# Altium PCB Baud-TxRx.PcbDoc
Units mm, origin at the board's own origin, x right, y up, seen from the top; angles counter-clockwise.
Board outline 152.4 x 101.6 mm, 2 copper layers (Top Layer, Bottom Layer); 5 components, 0 nets, 30 pads, 0 vias.
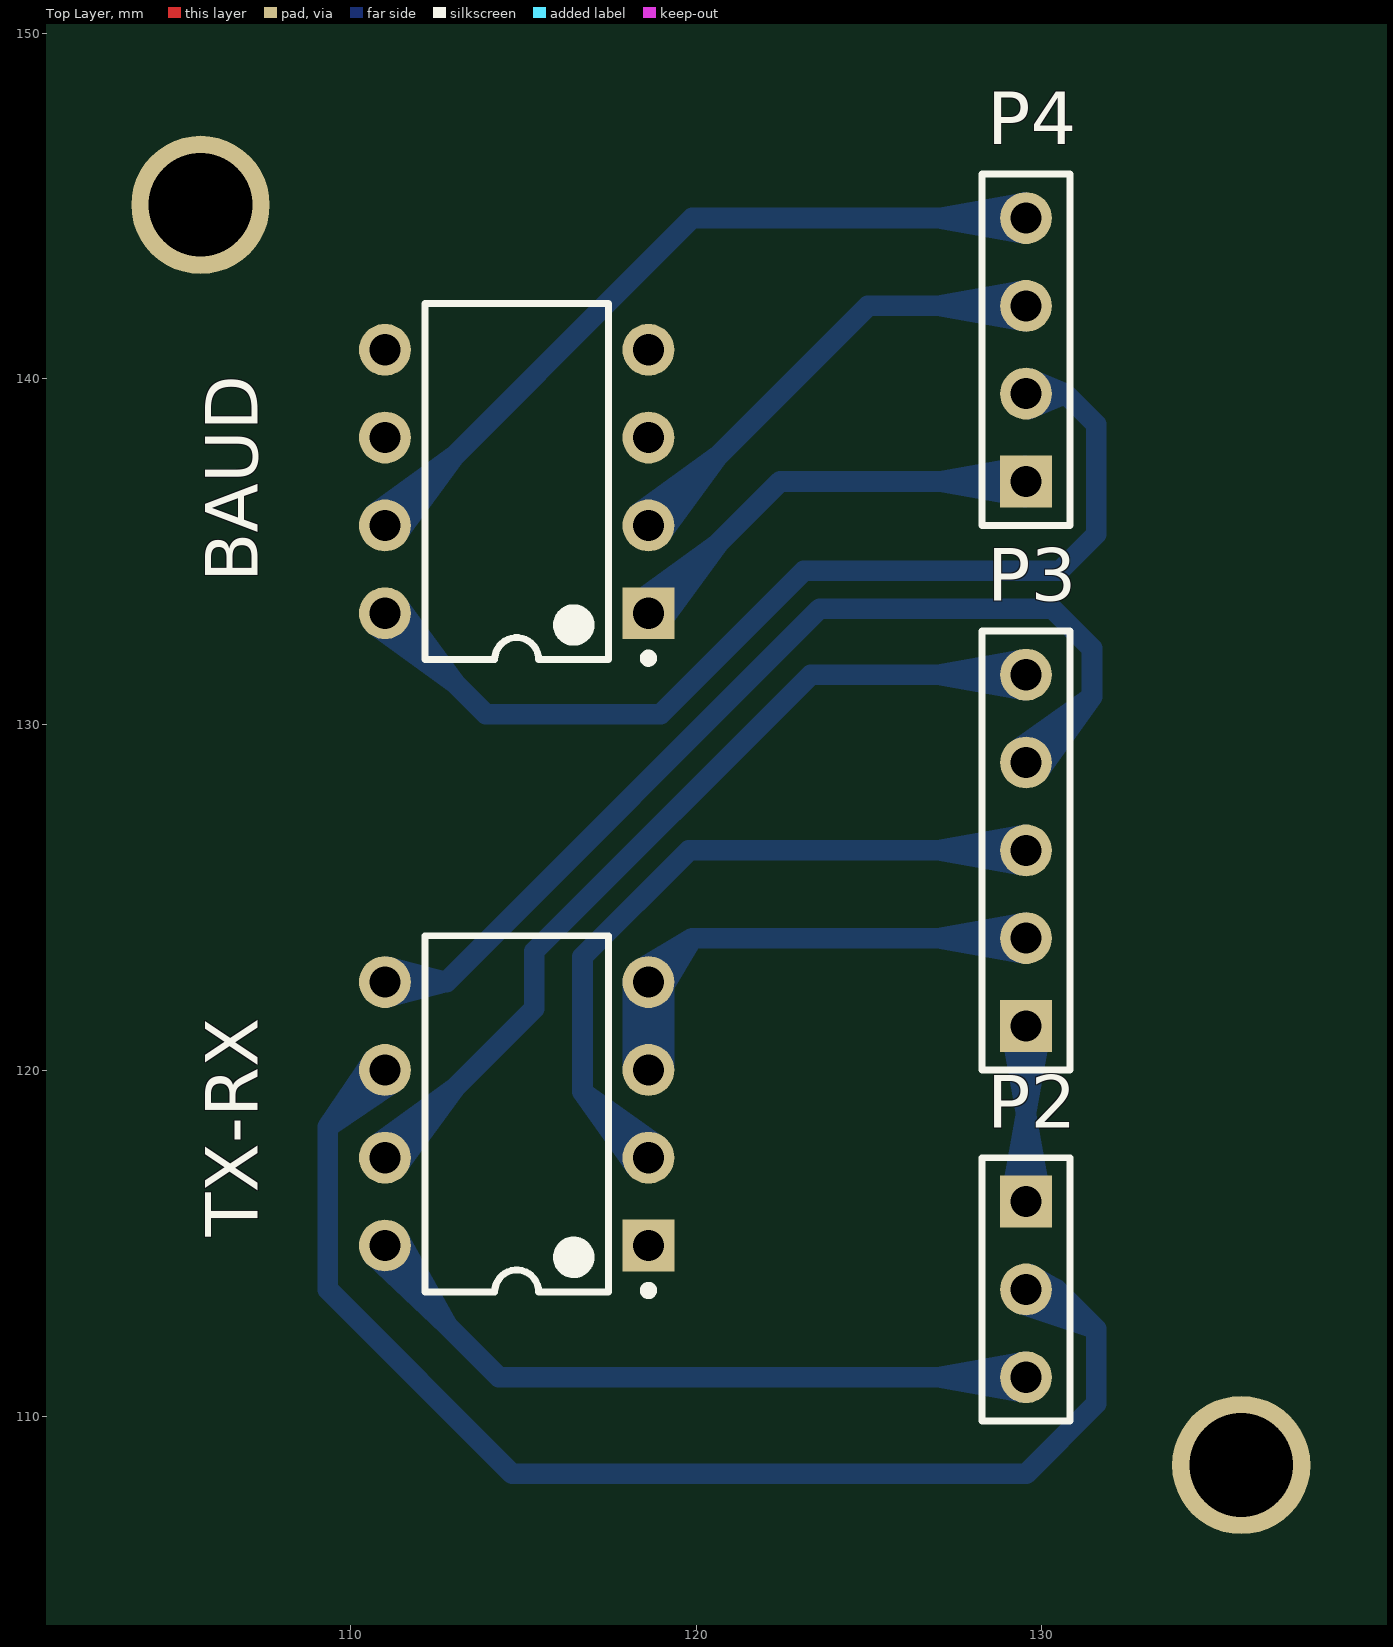
[diagram p0: Top Layer view]
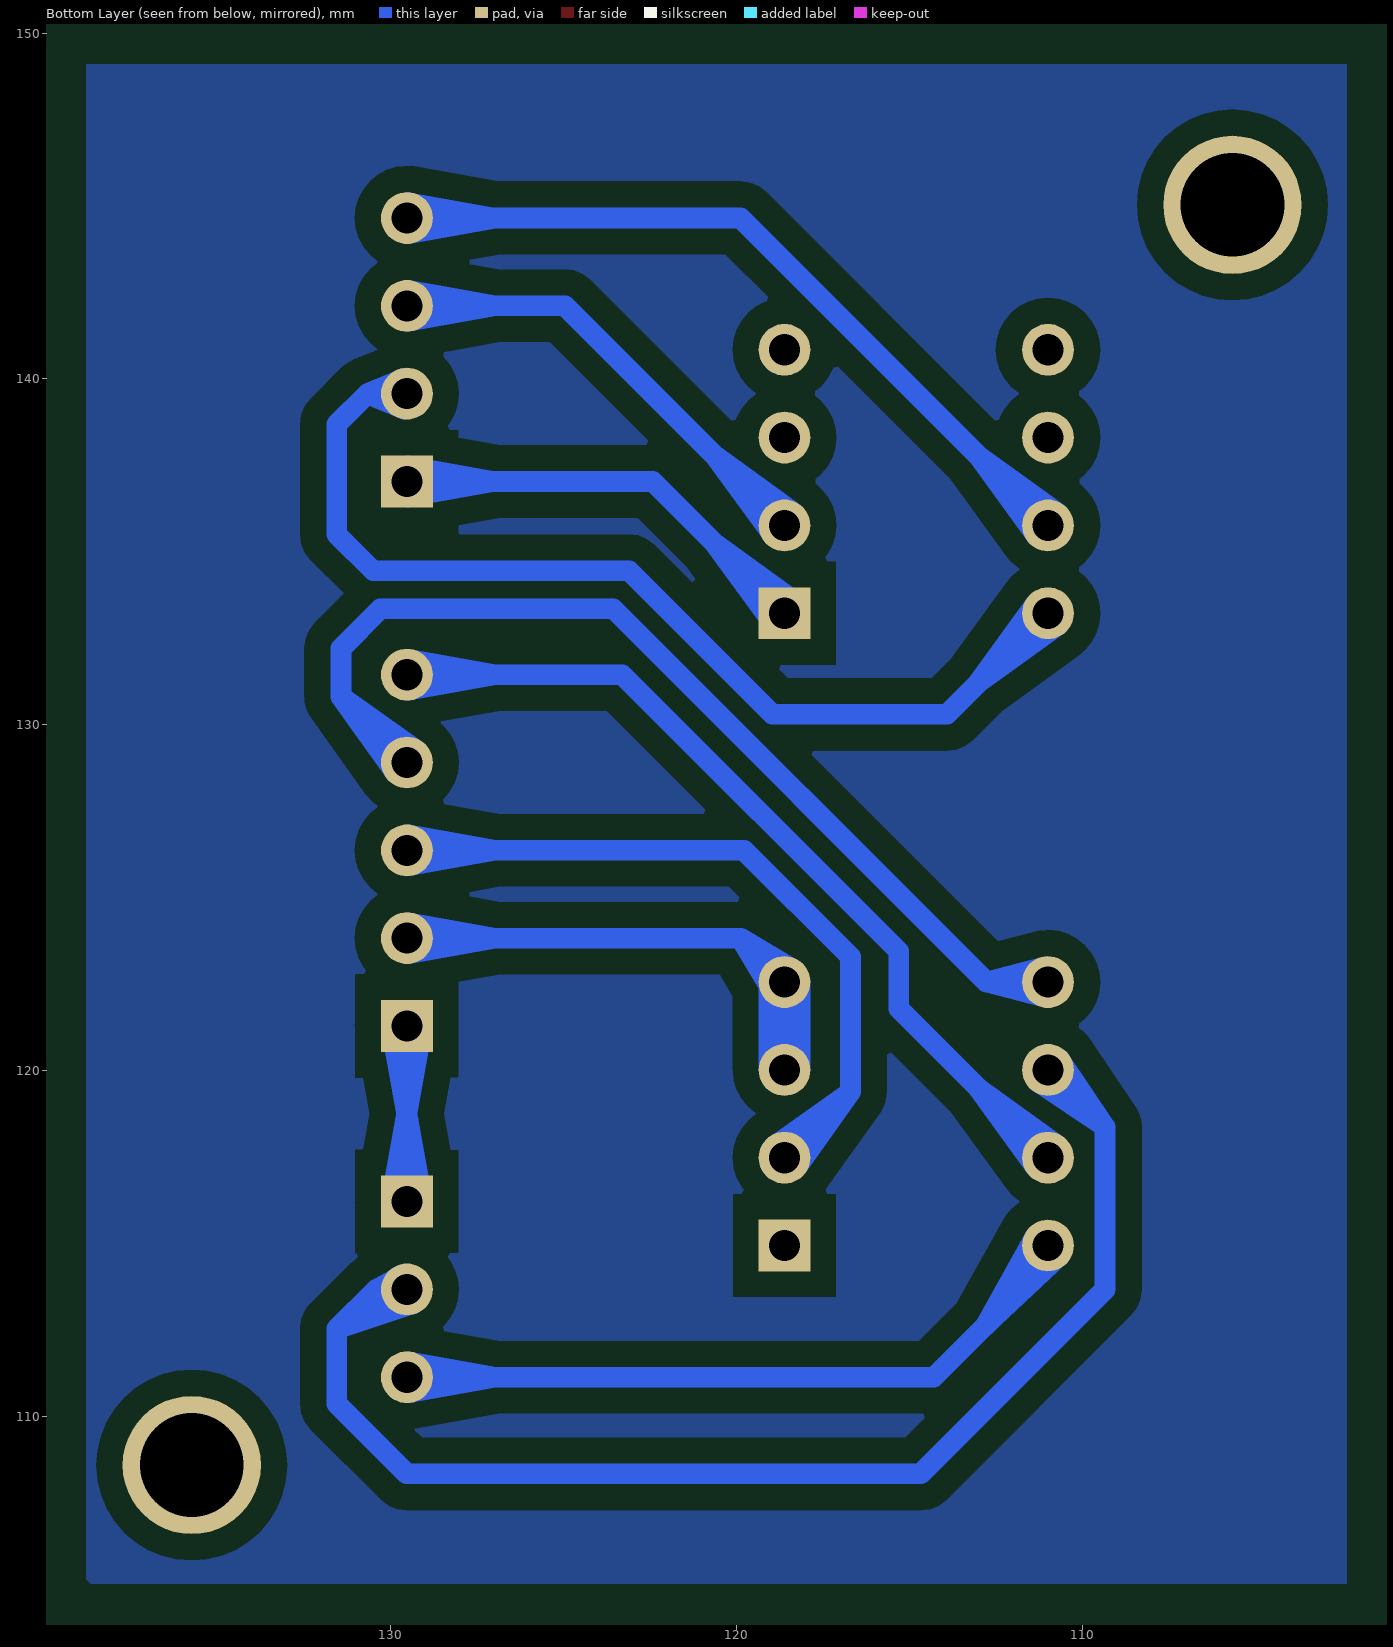
[diagram p1: Bottom Layer view, seen from below]

## Layer stack, top to bottom
Top Layer: signal copper 0.0356
Dielectric: dielectric 0.32, FR-4, Dk 4.8
Bottom Layer: signal copper 0.0356

## Board outline
16.383,82.55 168.783,82.55 168.783,184.15 16.383,184.15

## Design rules (kind name [scope] priority, off if disabled: settings)
Clearance [All] p1: gap=0.75
PolygonConnect [All] p1: connectstyle=Relief reliefconductorwidth=0.254 reliefentries=4 polygonreliefangle="90 Angle"
RoutingVias [All] p1: holewidth=0.711 width=1.27 viastyle="Through Hole" minholewidth=0.711 minwidth=1.27 maxholewidth=0.711 maxwidth=1.27
SilkscreenOverComponentPads [All] p1: minsilkscreentomaskgap=0.254
SolderMaskExpansion [All] p1: expansion=0.102
Width [All] p1: maxlimit=0.254 minlimit=0.254 preferedwidth=0.254
27 further rules are at their usual default settings.

## Components (designator, comment, footprint, x,y, rotation, side; value= is the part's Value field where it differs from the comment)
BAUD "SW-DIP4" DIP-8 114.808,137.033 r180 top (schematic designator S3)
P2 "Header 3" HDR1X3 129.54,116.205 r270 top
P3 "Header 5" HDR1X5 129.54,121.285 r90 top
P4 "Header 4" HDR1X4 129.54,137.033 r90 top
TX-RX "SW-DIP4" DIP-8 114.808,118.745 r180 top (schematic designator S2)

## Footprints (in the part's own frame and the unit in brackets; to place one, negate y for a bottom-side part, rotate by r counter-clockwise, add the part's x,y. Pads: shape width x height; smd on the part's side, far side on the other; paste and mask are expansions set on the pad)
DIP-8 [mm] "DIP; 8 Leads; Row Spacing 7.62 mm; Pitch 2.54 mm"
  rect 1.5x1.5 hole 0.9: 1(-3.81,3.81)
  round 1.5 hole 0.9: 2(-3.81,1.27) 3(-3.81,-1.27) 4(-3.81,-3.81) 5(3.81,-3.81) 6(3.81,-1.27) 7(3.81,1.27) 8(3.81,3.81)
  silkscreen extent -3.94,-5.15 2.65,5.23, body extent -3.6,-5.15 3.6,5.15, height 5.08
HDR1X3 [mm] "Connector; Header; 3 Position"
  rect 1.5x1.5 hole 0.9: 1(0,0)
  round 1.5 hole 0.9: 2(2.54,0) 3(5.08,0)
  silkscreen extent -1.27,-1.27 6.35,1.27
HDR1X4 [mm] "Connector; Header; 4 Position"
  rect 1.5x1.5 hole 0.9: 1(0,0)
  round 1.5 hole 0.9: 2(2.54,0) 3(5.08,0) 4(7.62,0)
  silkscreen extent -1.27,-1.27 8.89,1.27
HDR1X5 [mm] "Connector; Header; 5 Position"
  rect 1.5x1.5 hole 0.9: 1(0,0)
  round 1.5 hole 0.9: 2(2.54,0) 3(5.08,0) 4(7.62,0) 5(10.16,0)
  silkscreen extent -1.27,-1.27 11.43,1.27

## Part data
BAUD TX-RX: "DIP Switch"
P2: "Header, 3-Pin"
P3: "Header, 5-Pin"
P4: "Header, 4-Pin"

## Free pads (board coordinates)
  round 4 hole 3: 0(105.664,145.034) 0(135.763,108.585)

## Nets (pads, with @x,y where several pads share a name; then routed paths per layer and width w, separated by ;. In a path a pad name is that pad's centre, name@x,y a point inside that pad or via, vN(x,y) a via of type N, cw(c..) or ccw(c..) an arc to the next point about the centre after c; other vN are vias at no path point)
pads on no net: BAUD.1 BAUD.2 BAUD.3 BAUD.4 BAUD.5 BAUD.6 BAUD.7 BAUD.8 P2.1 P2.2 P2.3 P3.1 P3.2 P3.3 P3.4 P3.5 P4.1 P4.2 P4.3 P4.4 TX-RX.1 TX-RX.2 TX-RX.3 TX-RX.4 TX-RX.5 TX-RX.6 TX-RX.7 TX-RX.8
copper on no net: | length 384.3
  Bottom Layer w0.6: 110.651,120.301 109.347,118.364 ; 110.666,114.632 112.805,112.62 ; 110.706,117.817 113.021,119.498 111.34,117.183 ; 110.706,132.881 113.021,131.2 ; 110.706,136.105 113.021,137.786 111.34,135.471 ; 110.998,114.935 112.805,112.62 ; 110.998,117.475 115.316,121.793 115.316,123.444 123.317,131.445 129.54,131.445 ; 110.998,135.763 119.888,144.653 129.54,144.653 ; 111.055,122.109 112.776,122.555 ; 111.055,123.001 112.776,122.555 ; 111.252,114.173 114.3,111.125 129.54,111.125 ; 111.284,119.668 109.347,118.364 ; 111.34,133.515 113.021,131.2 ; 111.373,115.184 112.805,112.62 ; 118.17,122.515 118.618,120.015 ; 118.17,122.595 118.17,120.055 ; 118.184,122.437 119.066,120.055 ; 118.274,117.184 116.713,119.38 ; 118.326,133.565 120.641,135.246 118.96,132.931 ; 118.326,136.105 120.641,137.786 118.96,135.471 ; 118.342,122.911 119.888,123.825 ; 118.618,117.475 116.713,119.38 ; 118.618,133.223 122.428,137.033 129.54,137.033 ; 118.618,135.763 124.968,142.113 129.54,142.113 ; 118.909,117.819 116.713,119.38 ; 118.974,122.279 119.888,123.825 ; 119.052,122.437 118.17,120.055 ; 119.066,122.515 118.618,120.015 ; 119.066,122.595 119.066,120.055 ; 129.092,116.245 129.54,118.755 129.988,116.245 ; 129.092,121.245 129.54,118.735 129.988,121.245 ; 129.249,129.249 131.445,130.81 ; 129.358,113.253 131.572,112.522 ; 129.5,110.677 126.99,111.125 129.5,111.573 ; 129.5,123.377 126.99,123.825 129.5,124.273 ; 129.5,125.917 126.99,126.365 129.5,126.813 ; 129.5,130.997 126.99,131.445 129.5,131.893 ; 129.5,136.585 126.99,137.033 129.5,137.481 ; 129.5,141.665 126.99,142.113 129.5,142.561 ; 129.5,144.205 126.99,144.653 129.5,145.101 ; 129.54,116.205 129.54,121.285 ; 129.54,123.825 119.888,123.825 ; 129.54,126.365 119.793,126.365 116.713,123.285 116.713,119.38 ; 129.54,128.905 131.445,130.81 ; 129.54,139.573 130.683,139.573 ; 129.629,139.132 130.683,139.573 ; 129.629,140.014 130.683,139.573 ; 129.797,114.034 131.572,112.522 ; 129.884,128.614 131.445,130.81 ; 109.347,118.364 110.998,120.015 109.347,118.364 ; 109.347,118.364 109.347,113.665 114.681,108.331 129.54,108.331 131.572,110.363 131.572,112.522 ; 112.776,122.555 110.998,122.555 112.776,122.555 ; 112.776,122.555 123.571,133.35 130.302,133.35 131.445,132.207 131.445,130.81 ; 113.021,131.2 110.998,133.223 113.919,130.302 118.967,130.302 123.115,134.45 130.513,134.45 131.572,135.509 131.572,138.684 130.683,139.573 ; 118.17,120.055 118.618,122.555 ; 118.17,120.055 118.618,122.555 ; 118.618,120.015 118.618,122.555 ; 118.618,120.015 118.618,122.555 ; 118.618,122.555 119.888,123.825 ; 118.618,122.555 119.066,120.055 ; 118.618,122.555 119.066,120.055 ; 129.54,113.665 130.429,113.665 ; 129.54,113.665 130.429,113.665 ; 129.54,113.665 130.429,113.665 ; 129.54,113.665 131.572,112.522 ; 130.429,113.665 131.572,112.522 ; 130.429,113.665 129.654,114.1 130.429,113.665 ; 130.429,113.665 129.654,113.23 130.429,113.665

## Polygon pours and split planes (outlines as drawn)
no net on Bottom Layer "Bottom Layer-No Net" (solid): 102.362,149.098 138.811,149.098 138.811,105.283 138.684,105.156 102.362,105.156

## Silkscreen, mask and mechanical layers (free items; w line width, h text height)
Mechanical 1:
  lines w0.5: 101.854,104.267 101.854,149.733 139.319,149.733 139.319,104.267 101.854,104.267